# Altium PCB VNA_BASE_AF3.PcbDoc
Units mil, origin at the board's own origin, x right, y up, seen from the top; angles counter-clockwise.
Board outline 1960 x 1680.39 mil, 4 copper layers (Top Layer, Internal Plane 1, Signal Layer 1, Bottom Layer), stack 30.634 mil thick; 89 components, 116 nets, 460 pads, 227 vias.
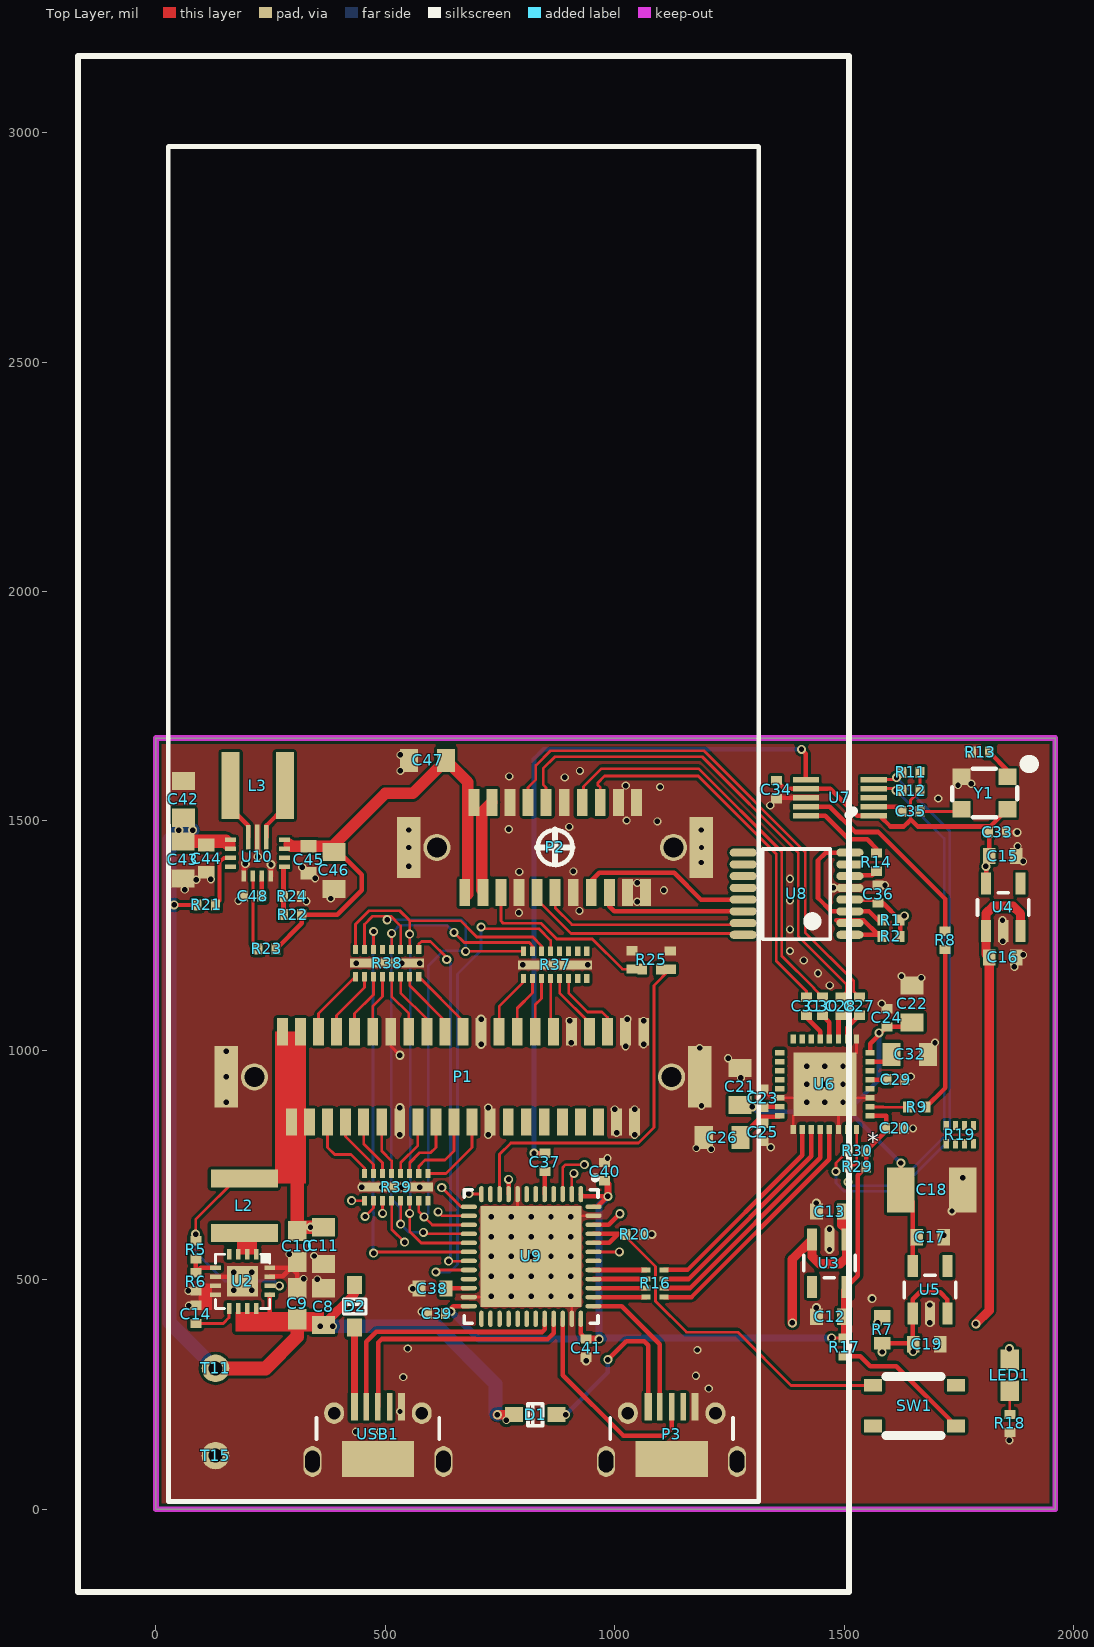
[diagram p0: Top Layer view]
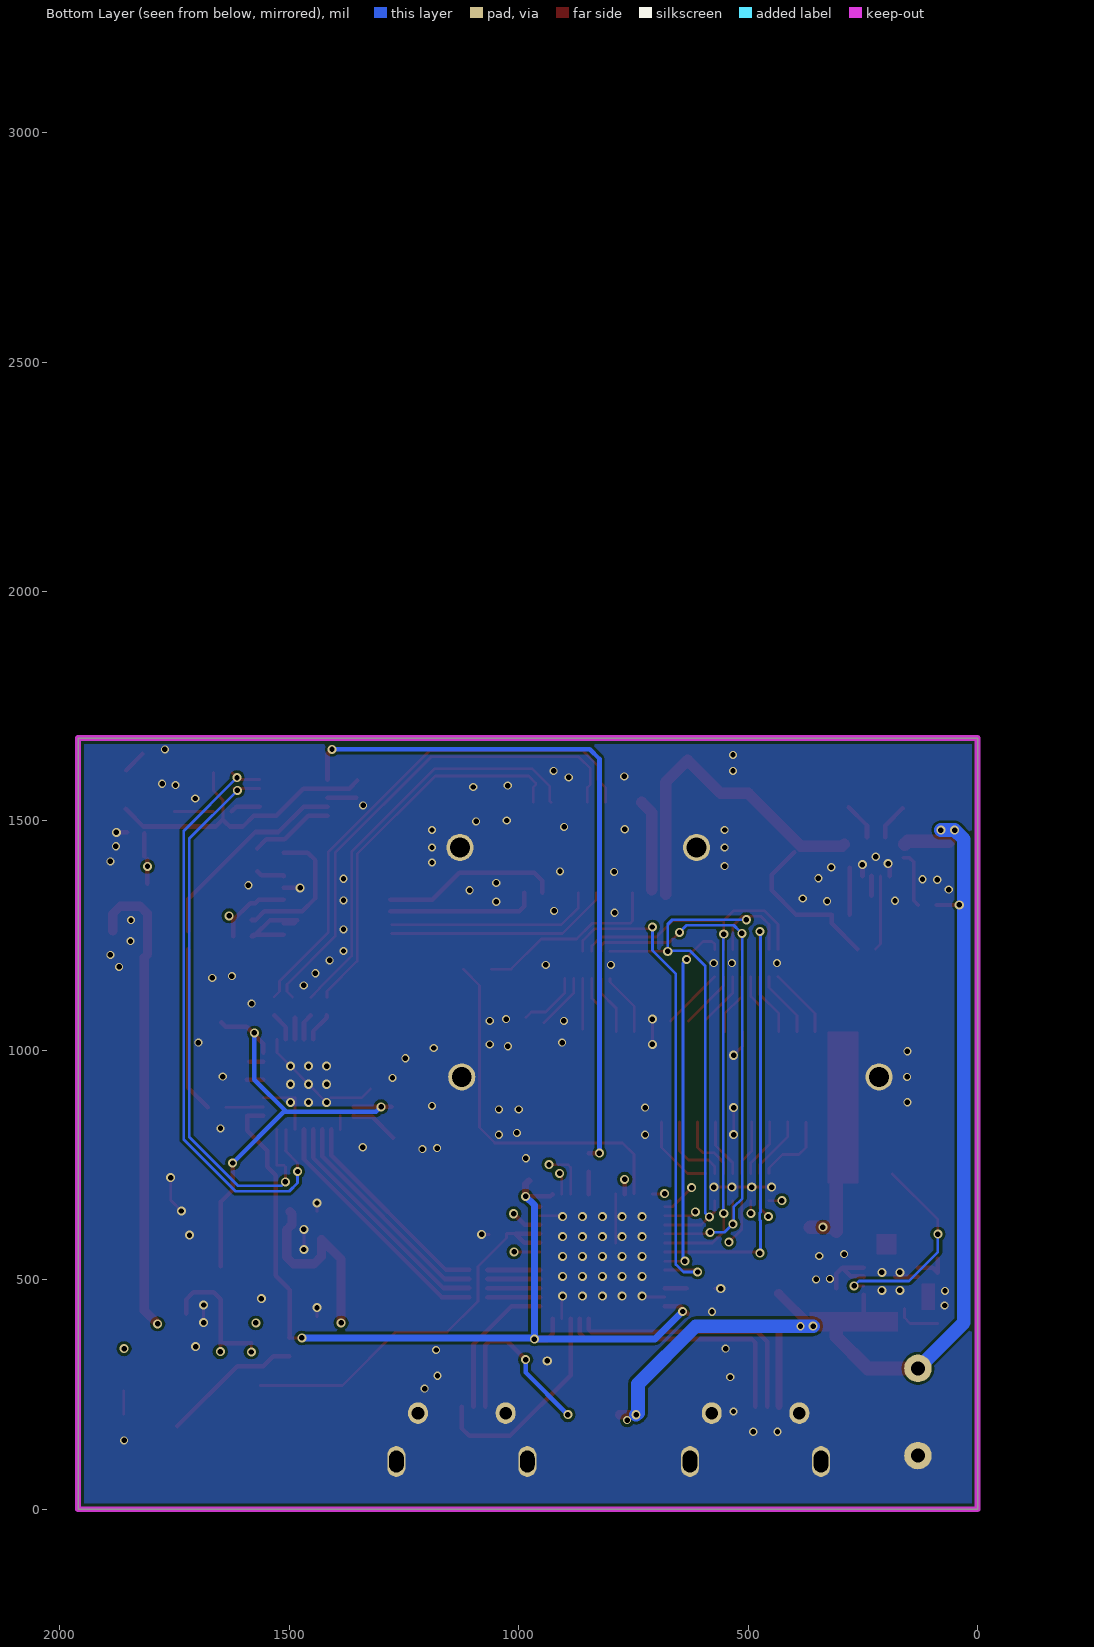
[diagram p1: Bottom Layer view, seen from below]
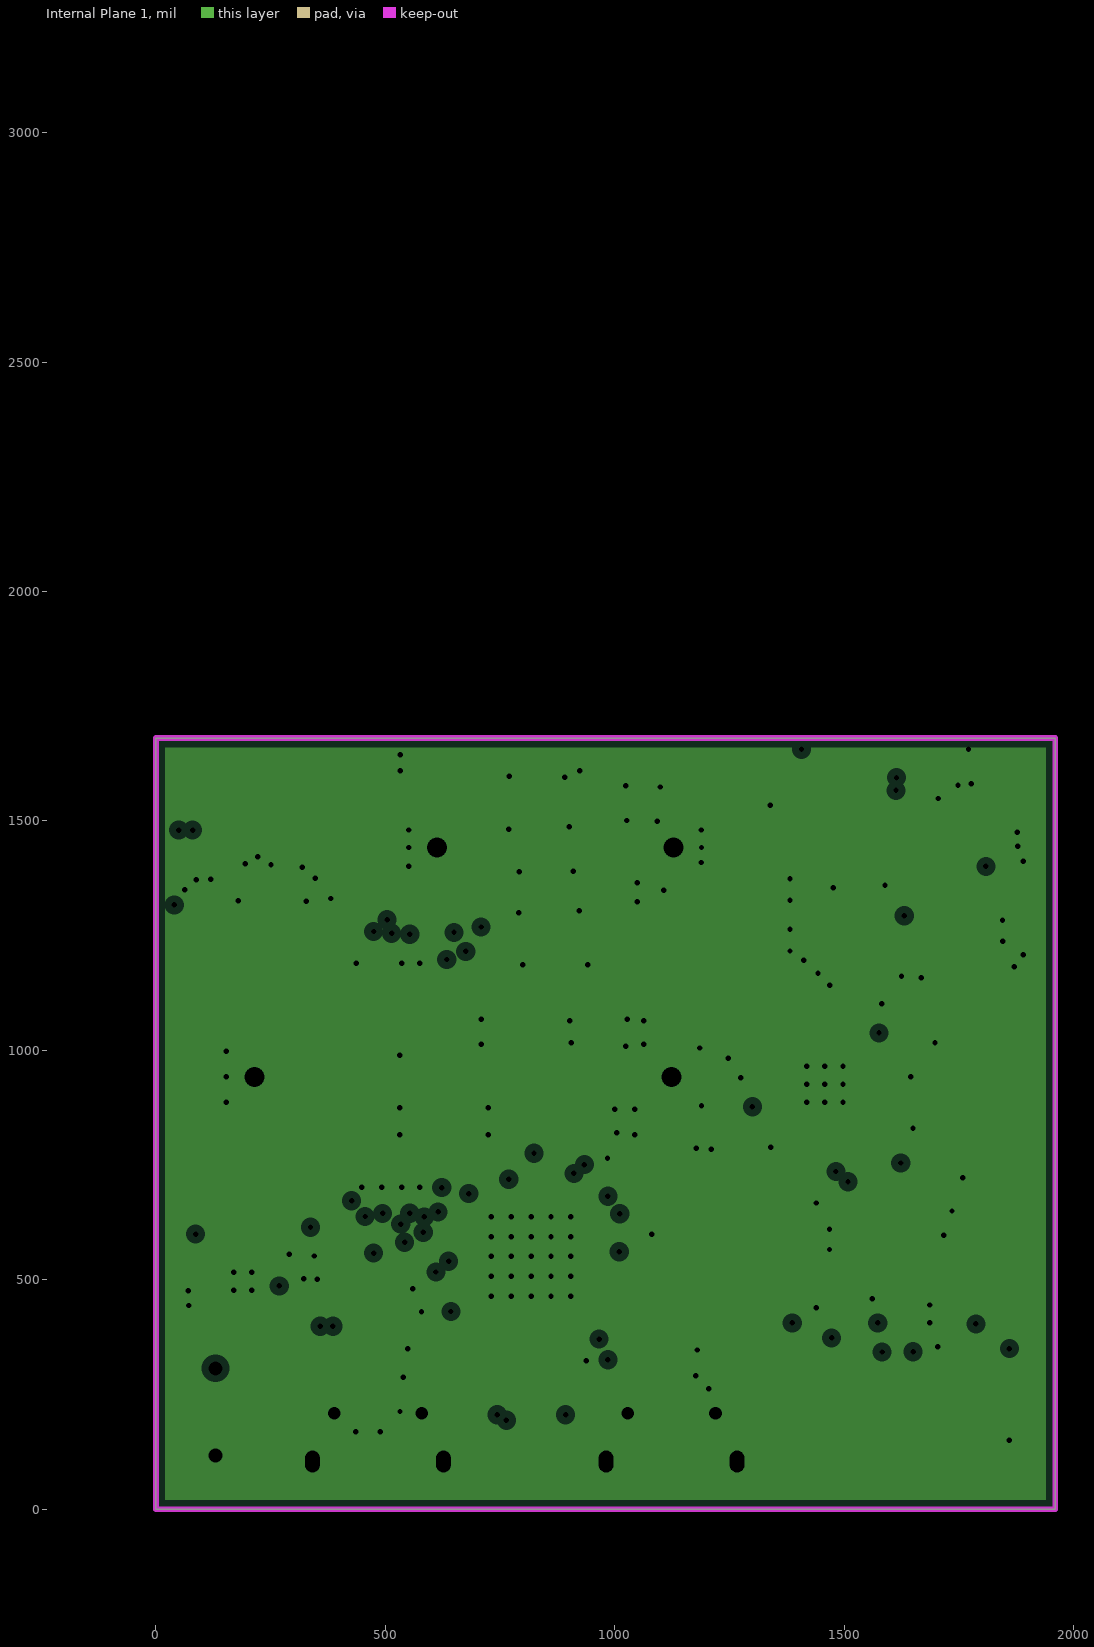
[diagram p2: Internal Plane 1, clearances drawn from the general rule]
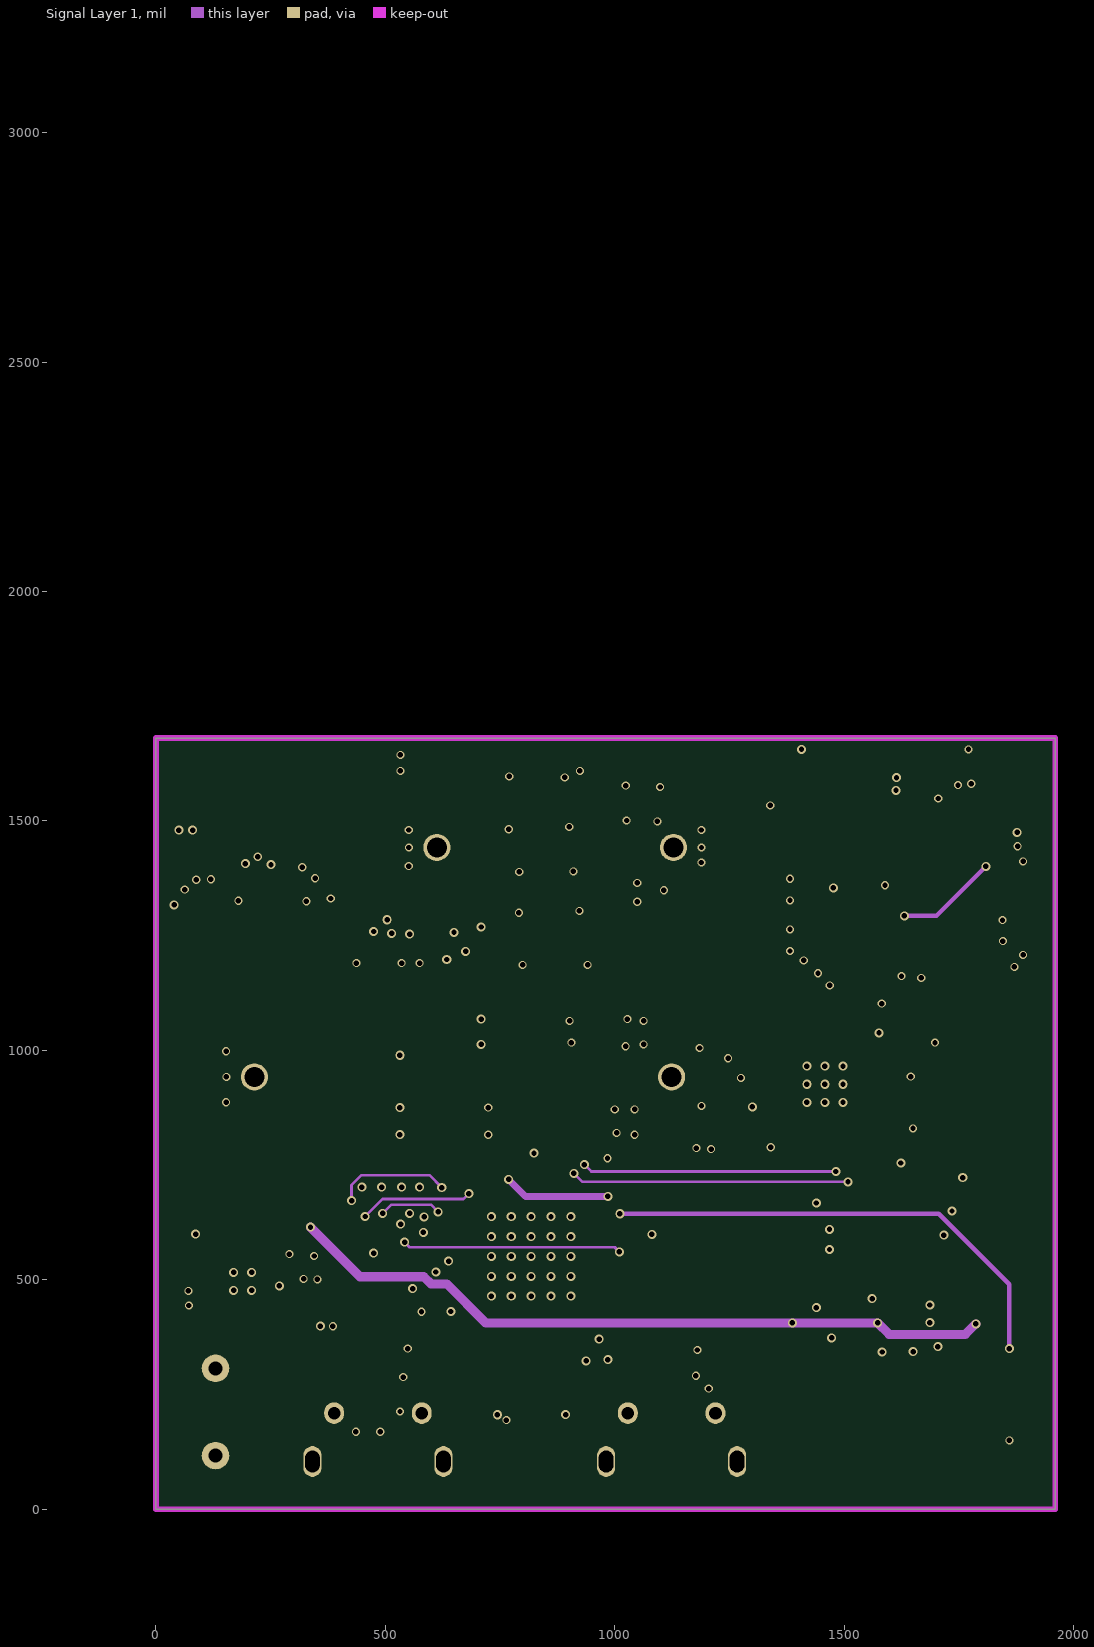
[diagram p3: Signal Layer 1]

## Layer stack, top to bottom
Top Solder: solder mask 0.4, Solder Resist, Dk 3.8
Top Layer: signal copper 1.4
Dielectric 1: core 10, Dk 4.2
Internal Plane 1: plane copper 1.417, net GND
Dielectric 3: core 10, Dk 4.2
Signal Layer 1: signal copper 1.417
Dielectric 4: prepreg 5, Dk 4.2
Bottom Layer: signal copper 1.4
Bottom Solder: solder mask 0.4, Solder Resist, Dk 3.8

## Board outline
0,0 0,1680.39 1960,1680.39 1960,0

## Design rules (kind name [scope] priority, off if disabled: settings)
Clearance 50R [InNetClass('50R') vs InPolygon] p1: gap=15 ignorepadtopadclearanceinfootprint=FALSE
Clearance [All] p2: gap=6 ignorepadtopadclearanceinfootprint=FALSE except(0: Arc-Hole Track-Hole SMDPad-Hole THPad-Hole Via-Hole Fill-Hole Poly-Hole Region-Hole Text-Hole)
DiffPairsRouting [All] p1: maxlimit=10 minlimit=6 mostfreqgap=6 toplayer_minwidth=6 toplayer_maxwidth=15 toplayer_prefwidth=15 midlayer1_minwidth=6 midlayer1_maxwidth=15 midlayer1_prefwidth=15 bottomlayer_minwidth=6 bottomlayer_maxwidth=15 bottomlayer_prefwidth=15 maxuncoupledlength=500
MinimumSolderMaskSliver [All] p1 off: minsoldermaskwidth=10
PlaneClearance [All] p1: clearance=15
PlaneConnect [All] p1: planeconnectstyle=Direct reliefexpansion=20 reliefentries=4 reliefconductorwidth=10 reliefairgap=10
PolygonConnect [All] p1: connectstyle=Direct reliefconductorwidth=10 reliefentries=4 polygonreliefangle="90 Angle" airgapwidth=10
RoomDefinition connectorA [InComponentClass('connectorA')] p1 off: confinementstyle=ConfineIn formatcopy=TRUE lockcomponents=FALSE outline 1316.04,962.09 2428.04,962.09 2428.04,1188.09 1316.04,1188.09
RoomDefinition AudioADCA [InComponentClass('AudioADCA')] p2 off: confinementstyle=ConfineIn formatcopy=TRUE lockcomponents=FALSE outline 1316.04,158.09 5214.04,158.09 5214.04,513.09 1316.04,513.09
RoomDefinition clock [InComponentClass('clock')] p3 off: confinementstyle=ConfineIn formatcopy=TRUE lockcomponents=FALSE outline 1315.04,447.09 3855.04,447.09 3855.04,796.09 1315.04,796.09
RoomDefinition MCU [InComponentClass('MCU')] p4 off: confinementstyle=ConfineIn formatcopy=TRUE lockcomponents=FALSE outline 879.04,1574.09 10029.04,1574.09 10029.04,1924.09 879.04,1924.09
RoomDefinition power [InComponentClass('power')] p5 off: confinementstyle=ConfineIn formatcopy=TRUE lockcomponents=FALSE outline 884.04,1249.09 2939.04,1249.09 2939.04,1524.09 884.04,1524.09
RoutingVias [All] p1: holewidth=12 width=20 viastyle="Through Hole" minholewidth=11.81 minwidth=19.68 maxholewidth=28 maxwidth=50
SilkToBoardRegionClearance [All] p1 off:
SilkToSilkClearance [All] p1 off: silktosilkclearance=10
SilkToSolderMaskClearance [IsPad] p1 off: minsilkscreentomaskgap=10 clearancetoexposedcopper=TRUE
SolderMaskExpansion [All] p1: expansion=4
Width [All] p1: maxlimit=60 minlimit=6 preferedwidth=6
23 further rules are at their usual default settings.

## Classes and differential pairs
component class AudioADCA: C20 C21 C22 C23 C24 C25 C26 C27 C28 C29 C30 C31 C32 R9 R29 R30 U6
component class power: C8 C9 C10 C11 C12 C13 C14 C15 C16 C17 C18 C19 C42 C43 C44 C45 C46 C47 C48 L2 L3 R5 R6 R7 R21 R22 R23 R24 T11 T15 U2 U3 U4 U5 U10
component class clock: C33 C34 C35 C36 R1 R2 R8 R11 R12 R13 R14 U7 U8 Y1
component class connectorA: P1 P2 R25 R37 R38 R39
component class MCU: C37 C38 C39 C40 C41 D1 D2 LED1 P3 R16 R17 R18 R19 R20 SW1 U9 USB1
differential pair REF1: +REF1_P -REF1_N
differential pair REFLECT1: +REFLECT1_P -REFLECT1_N

## Components (designator, comment, footprint, x,y, rotation, side; value= is the part's Value field where it differs from the comment)
C8 "Cap" 0805 364.91,441.65 r90 top value="22uF 25V"
C9 "Cap" 0603 307.91,447.65 r90 top value="4.7uF 25V"
C10 "Cap" 0603 307.91,572.65 r90 top value="4.7uF 25V"
C11 "Cap" 0805 364.91,574.65 r90 top value="22uF 25V"
C12 "4.7uF" 0603L 1469.1,419.79 r0 top
C13 "4.7uF" 0603L 1469.1,648.79 r0 top
C14 "3.3nF" 0402 87.04,424.65 r90 top
C15 "4.7uF" 0603L 1845.6,1423.51 r180 top
C16 "4.7uF" 0603L 1845.6,1202.51 r180 top
C17 "4.7uF" 0603L 1687.87,592.83 r180 top
C18 "220uF,Tan" 1210 1690.87,695.83 r180 top
C19 "4.7uF" 0603L 1679.87,359.83 r180 top
C20 "0.1uF" 0402 1610,830 r180 top
C21 "4.7uF" 0805 1273.07,921.21 r270 top
C22 "4.7uF" 0805 1648.07,1101.21 r270 top
C23 "0.1uF" 0402 1323.07,896.21 r270 top
C24 "0.1uF" 0402 1593.07,1071.21 r270 top
C25 "0.1uF" 0402 1323.07,821.21 r90 top
C26 "4.7uF" 0805 1234,810 r0 top
C27 "10uF" 0402 1533.07,1096.21 r90 top
C28 "10uF" 0402 1493.07,1096.21 r90 top
C29 "4.7uF" 0402 1613.07,936.21 r180 top
C30 "10uF" 0402 1453.07,1096.21 r270 top
C31 "10uF" 0402 1418.07,1096.21 r270 top
C32 "22uF" 0805 1643.07,991.21 r180 top
C33 "0.1uF" 0402 1834,1475 r180 top
C34 "0.1uF" 0402 1352.04,1568.52 r270 top
C35 "0.1uF" 0402 1645.46,1520.84 r180 top
C36 "0.1uF" 0402 1573.88,1340.96 r270 top
C37 "Cap" 0402 847.83,755.94 r90 top value=0.1uF
C38 "Cap" 0603L 602.83,480.94 r0 top value=4.7uF
C39 "Cap" 0402 611.54,426.49 r0 top value=0.1uF
C40 "Cap" 0402 977.83,735.94 r270 top value=0.1uF
C41 "Cap" 0402 937.83,350.94 r90 top value=0.1uF
C42 "10uF" 0805 60,1547 r270 top
C43 "10uF" 0805 59,1415 r90 top
C44 "0.1uF" 0603L 110,1418 r90 top
C45 "0.1uF" 0603L 332.87,1415.71 r90 top
C46 "10uF" 0805 387.87,1392.09 r90 top
C47 "10uF" 0805 592.09,1632.13 r0 top
C48 "0.1uF" 0402 211,1336 r180 top
D1 "" LC-SOD-323 826.85,205.98 r0 top
D2 "" LC-SOD-323 433.15,442.2 r270 top
L2 "2.2uH" L4015 192.91,602.36 r90 top
L3 "1.5uH" L4015 162.87,1577.17 r0 top
LED1 "LED0" 0603 1860.94,292.17 r270 top
P1 "DF9-41S" VNA_CHANNEL 27.64,17 r0 top
P2 "DF9-21" DF9-21P 870.16,1442.2 r180 bottom
P3 "SWD_MicroUSB" MICRO-YZX 1124,-7 r0 top
R1 "10k" 0402 1601.8,1284.07 r0 top
R2 "10k" 0402 1601.8,1248.64 r0 top
R5 "51k 1%" 0402 87.04,565.65 r270 top
R6 "10k 1%" 0402 87.04,495.65 r270 top
R7 "FB" 0603L 1582.76,391.02 r90 top value=0Ohm
R8 "22R" 0402 1720,1240 r270 top
R9 "22R" 0402 1658.07,876.21 r0 top
R11 "4.7k" 0402 1645.46,1605.84 r180 top
R12 "4.7k" 0402 1645.46,1565.84 r180 top
R13 "NC" 0402 1797,1650 r180 top
R14 "22R" 0402 1570,1410 r90 top
R16 "50R*4" 0402X4 1088,492 r180 top
R17 "1k" 0402 1499.96,353.33 r90 top value=0Ohm
R18 "10k" 0402 1860.94,187.17 r270 top value=0Ohm
R19 "50R*4" 0402X4 1752.05,816.21 r90 top
R20 "Res2" 0402 1044,599 r0 top value=10k
R21 "10k" 0402 110,1317 r180 top
R22 "17k" 0402 297.87,1295.71 r0 top
R23 "10k" 0402 242,1221 r0 top
R24 "10k" 0402 297.87,1335.71 r180 top
R25 "PiFilter" PiFIiter 1080,1177 r180 top
R29 "Res2" 0402 1528.07,746.21 r0 top value=10k
R30 "Res2" 0402 1528.07,781.21 r0 top value=10k
R37 "NUF8xxx" NUF8xxx 870.16,1186.29 r0 top
R38 "NUF8xxx" NUF8xxx 504.02,1190.23 r0 top
R39 "NUF8xxx" NUF8xxx 523.7,702.04 r0 top
SW1 "SW-PB" SW3x4 1653.62,225.66 r0 top
T11 "TestPad" TestPad 130,307 r0 top
T15 "TestPad" TestPad 130,117 r90 top
U2 "TPS62130" TPS62130 189.04,496.65 r270 top
U3 "LP5907" SOT23-5 1468.1,536.79 r180 top
U4 "LP5907" SOT23-5 1846.6,1311.51 r0 top
U5 "LP5907" SOT23-5 1686.87,477.83 r0 top
U6 "ADAU1761" ADAU1761 1458.07,926.21 r180 top
U7 "SI5351" si5351 1490.46,1550.84 r180 top
U8 "SN65LVDS105" "TSSOP16_44MM_065P - duplicate" 1396.25,1341.46 r180 top
U9 "STM32F401CCU6" STM-UFQFPN48_N 817.83,550.94 r270 top
U10 "tps63070" TPS63070 221.36,1429.34 r90 top
USB1 "USB Micro Type B" MICRO-YZX 484,-7 r0 top
Y1 "OSC_40M" TXC_7Q 1805.46,1560.84 r180 top

## Footprints (in the part's own frame and the unit in brackets; to place one, negate y for a bottom-side part, rotate by r counter-clockwise, add the part's x,y. Pads: shape width x height; smd on the part's side, far side on the other; paste and mask are expansions set on the pad)
0402 [mil] "0402-RES"
  rect 20x24 smd: 1(-19.68,0) 2(20,0)
0402X4 [mm]
  rect 0.5x0.28 smd: 1(-0.5,0.75) 2(-0.5,0.25) 3(-0.5,-0.25) 4(-0.5,-0.75) 5(0.5,-0.75) 6(0.5,-0.25) 7(0.5,0.25) 8(0.5,0.75)
0603 [mil] "0603-RES"
  rect 44x40 smd: 1(-33.46,0) 2(34,0)
  body extent -31,-16 31,16, height 31
0603L [mm]
  rect 0.7x0.9 smd: 1(-0.75,0) 2(0.75,0)
  body extent -0.8,-0.4 0.8,0.4, height 0.8
0805 [mil]
  rect 39.37x50 smd: 1(-40,0) 2(40,0)
  body extent -50,-30 50,30, height 31
1210 [mm]
  rect 1.52x2.5 smd: 1(-1.715,0) 2(1.715,0)
ADAU1761 [mm]
  rect 3.5x3.5 smd: 0(0,0)
  rect 0.5x0.3 smd: 1(-2.5,1.75) 2(-2.5,1.25) 3(-2.5,0.75) 4(-2.5,0.25) 5(-2.5,-0.25) 6(-2.5,-0.75) 7(-2.5,-1.25) 8(-2.5,-1.75) 17(2.5,-1.75) 18(2.5,-1.25) 19(2.5,-0.75) 20(2.5,-0.25) 21(2.5,0.25) 22(2.5,0.75) 23(2.5,1.25) 24(2.5,1.75)
  rect 0.3x0.5 smd: 9(-1.75,-2.5) 10(-1.25,-2.5) 11(-0.75,-2.5) 12(-0.25,-2.5) 13(0.25,-2.5) 14(0.75,-2.5) 15(1.25,-2.5) 16(1.75,-2.5) 25(1.75,2.5) 26(1.25,2.5) 27(0.75,2.5) 28(0.25,2.5) 29(-0.25,2.5) 30(-0.75,2.5) 31(-1.25,2.5) 32(-1.75,2.5)
  body extent -2.5,-2.5 2.5,2.5, height 0.8
DF9-21P [mm]
  rect 1.3x3.4 smd far side: 0(-8.1,0) 0(8.1,0)
  round 1.5 hole 1.1: 0(-6.55,0) 0(6.55,0)
  rect 0.6x1.5 smd far side: 1(-5,-2.5) 2(-4,-2.5) 3(-3,-2.5) 4(-2,-2.5) 5(-1,-2.5) 6(0,-2.5) 7(1,-2.5) 8(2,-2.5) 9(3,-2.5) 10(4,-2.5) 11(5,-2.5) 12(4.5,2.5) 13(3.5,2.5) 14(2.5,2.5) 15(1.5,2.5) 16(0.5,2.5) 17(-0.5,2.5) 18(-1.5,2.5) 19(-2.5,2.5) 20(-3.5,2.5) 21(-4.5,2.5)
  body extent -8.08,-2.83 8.02,2.77, height 0.2
L4015 [mm]
  rect 1x3.7 smd: 1(0,0) 2(3,0)
LC-SOD-323 [mm]
  rect 1x0.83 smd: 1(1.18,0) 2(-1.18,0)
  silkscreen extent -0.4,-0.6 0.4,0.6, body extent -1.35,-0.62 1.35,0.63, height 1.1
MICRO-YZX [mm]
  rect 0.4x1.5 smd: 1(-1.3,5.85) 5(1.3,5.85)
  rect 0.3x1.5 smd: 2(-0.65,5.85) 3(0,5.85) 4(0.65,5.85)
  oval 1x1.7 hole 0.8 slot 1.2 at 90 deg: 5(-3.625,2.82) 5(3.625,2.82)
  oval 1.1x1.2 hole 0.7: 5(-2.425,5.5) 5(2.425,5.5)
  rect 4x2 smd: 5(0,2.95)
  silkscreen extent -3.4,4.05 3.4,5.25, body extent -4.02,0.33 3.98,5.93, height 2.6
NUF8xxx [mm]
  rect 4.1x0.5 smd: 0(0,0)
  rect 0.28x0.51 smd: 1(-1.75,-0.75) 2(-1.25,-0.75) 3(-0.75,-0.75) 4(-0.25,-0.75) 5(0.25,-0.75) 6(0.75,-0.75) 7(1.25,-0.75) 8(1.75,-0.75) 9(1.75,0.75) 10(1.25,0.75) 11(0.75,0.75) 12(0.25,0.75) 13(-0.25,0.75) 14(-0.75,0.75) 15(-1.25,0.75) 16(-1.75,0.75)
  body extent -2,-0.8 2,0.8, height 0.9
PiFIiter [mil]
  rect 24x20 smd: 1(-41,0) 2(42,-0.31) 3(-41,-39.68) 3(42,-40)
  rect 20x24 smd: 1(-19.69,0) 2(20,0)
si5351 [mm]
  rect 1.45x0.3 smd: 1(-1.875,1) 2(-1.875,0.5) 3(-1.875,0) 4(-1.875,-0.5) 5(-1.875,-1) 6(1.875,-1) 7(1.875,-0.5) 8(1.875,0) 9(1.875,0.5) 10(1.875,1)
  silkscreen extent -0.75,0.75 -0.5,0.95
SOT23-5 [mil] "SOT23-5"
  rect 22x48 smd: 1(-37.4,-51.19) 2(0,-51.19) 3(38,-51.19) 4(38,52) 5(-37.4,52)
  silkscreen extent -56,-17 56,32, body extent -57,-55 57,55, height 47
STM-UFQFPN48_N [mm] "QFN, 48-Leads, Body 7.1x7.1mm, Pitch 0.5mm, Thermal Pad 5.6x5.6mm, IPC Medium Density"
  oval 0.9x0.25 smd: 1(-3.45,2.75) 2(-3.45,2.25) 3(-3.45,1.75) 4(-3.45,1.25) 5(-3.45,0.75) 6(-3.45,0.25) 7(-3.45,-0.25) 8(-3.45,-0.75) 9(-3.45,-1.25) 10(-3.45,-1.75) 11(-3.45,-2.25) 12(-3.45,-2.75) 25(3.45,-2.75) 26(3.45,-2.25) 27(3.45,-1.75) 28(3.45,-1.25) 29(3.45,-0.75) 30(3.45,-0.25) 31(3.45,0.25) 32(3.45,0.75) 33(3.45,1.25) 34(3.45,1.75) 35(3.45,2.25) 36(3.45,2.75)
  oval 0.25x0.9 smd: 13(-2.75,-3.45) 14(-2.25,-3.45) 15(-1.75,-3.45) 16(-1.25,-3.45) 17(-0.75,-3.45) 18(-0.25,-3.45) 19(0.25,-3.45) 20(0.75,-3.45) 21(1.25,-3.45) 22(1.75,-3.45) 23(2.25,-3.45) 24(2.75,-3.45) 37(2.75,3.45) 38(2.25,3.45) 39(1.75,3.45) 40(1.25,3.45) 41(0.75,3.45) 42(0.25,3.45) 43(-0.25,3.45) 44(-0.75,3.45) 45(-1.25,3.45) 46(-1.75,3.45) 47(-2.25,3.45) 48(-2.75,3.45)
  rect 5.6x5.6 smd: 49(0,0)
  silkscreen extent -4.47,-3.7 3.7,3.7, body extent -3.55,-3.55 3.55,3.55, height 0.6
SW3x4 [mm]
  rect 1x0.7 smd: 1(-2.3,1.125) 2(2.3,-1.125) 3(2.3,1.125) 4(-2.3,-1.125)
  silkscreen extent -1.58,-1.65 1.45,1.63, body extent -2,-1.5 2,1.5, height 2.6
TestPad [mil]
  round 60 hole 30: 1(0,0)
TPS62130 [mm]
  rect 1.7x1.7 smd: 0(0,0)
  rect 0.6x0.25 smd: 1(-1.5,0.75) 2(-1.5,0.25) 3(-1.5,-0.25) 4(-1.5,-0.75) 9(1.5,-0.75) 10(1.5,-0.25) 11(1.5,0.25) 12(1.5,0.75)
  rect 0.25x0.6 smd: 5(-0.75,-1.5) 6(-0.25,-1.5) 7(0.25,-1.5) 8(0.75,-1.5) 13(0.75,1.5) 14(0.25,1.5) 15(-0.25,1.5) 16(-0.75,1.5)
  silkscreen extent -1.5,-1.5 1.5,1.5, body extent -1.5,-1.5 1.5,1.5, height 0.6
TPS63070 [mm]
  rect 0.6x0.25 smd: 1(-1.25,0.75) 2(-1.25,0.25) 3(-1.25,-0.25) 4(-1.25,-0.75)
  rect 0.25x0.6 smd: 5(-0.75,-1.5) 6(-0.25,-1.5) 7(0.25,-1.5) 8(0.75,-1.5) 12(0.75,1.5) 13(0.25,1.5) 14(-0.25,1.5) 15(-0.75,1.5)
  rect 1.35x0.25 smd: 9(0.9,-0.5) 11(0.9,0.5)
  rect 1.7x0.25 smd: 10(0.75,0)
  body extent -1.25,-1.5 1.25,1.5, height 1
"TSSOP16_44MM_065P - duplicate" [mm]
  oval 1.5x0.45 smd: 1(-2.95,2.275) 2(-2.95,1.625) 3(-2.95,0.975) 4(-2.95,0.325) 5(-2.95,-0.325) 6(-2.95,-0.975) 7(-2.95,-1.625) 8(-2.95,-2.275) 9(2.95,-2.275) 10(2.95,-1.625) 11(2.95,-0.975) 12(2.95,-0.325) 13(2.95,0.325) 14(2.95,0.975) 15(2.95,1.625) 16(2.95,2.275)
  silkscreen extent -1.88,-2.47 1.88,2.53
TXC_7Q [mm]
  rect 1x0.9 smd: 1(-1.275,-0.9) 2(1.275,-0.9) 3(1.275,0.9) 4(-1.275,0.9)
  silkscreen extent -2.52,-1.6 1.78,1.35
VNA_CHANNEL [mm]
  rect 1.3x3.4 smd: 0(3.2,23.5) 0(29.4,23.5)
  round 1.5 hole 1.1: 0(4.75,23.5) 0(27.85,23.5)
  rect 0.6x1.5 smd: 1(6.3,26) 2(7.3,26) 3(8.3,26) 4(9.3,26) 5(10.3,26) 6(11.3,26) 7(12.3,26) 8(13.3,26) 9(14.3,26) 10(15.3,26) 11(16.3,26) 12(17.3,26) 13(18.3,26) 14(19.3,26) 15(20.3,26) 16(21.3,26) 17(22.3,26) 18(23.3,26) 19(24.3,26) 20(25.3,26) 21(26.3,26) 22(25.8,21) 23(24.8,21) 24(23.8,21) 25(22.8,21) 26(21.8,21) 27(20.8,21) 28(19.8,21) 29(18.8,21) 30(17.8,21) 31(16.8,21) 32(15.8,21) 33(14.8,21) 34(13.8,21) 35(12.8,21) 36(11.8,21) 37(10.8,21) 38(9.8,21) 39(8.8,21) 40(7.8,21) 41(6.8,21)
  silkscreen extent -5,-5 37.66,80, body extent 3.28,20.7 29.38,26.3, height 0.4

## Part data
C8 C9 C10 C11 C37 C38 C39 C40 C41: "Capacitor", LatestRevisionDate=17-Jul-2002, LatestRevisionNote="Re-released for DXP Platform.", PackageDescription="Radial Cap, Thru-Hole; 2 Leads; 0.3 in Pin Spacing", PackageReference=RAD-0.3, Published=8-Jun-2000, Publisher="Altium Limited"
C12 C13 C14 C15 C16 C17 C18 C19 C20 C21 C22 C23 C24 C25 C26 C27 C28 C29 C30 C31 C32 C42 C43 C44 C45 C46 C47 C48: library part Cap, "Capacitor", LatestRevisionDate=17-Jul-2002, LatestRevisionNote="Re-released for DXP Platform.", PackageDescription="Radial Cap, Thru-Hole; 2 Leads; 0.3 in Pin Spacing", PackageReference=RAD-0.3, Published=8-Jun-2000, Publisher="Altium Limited"
C33 C34 C35 C36: library part CAP0402-CAP, "<b>Capacitor</b> / Standard 0603 ceramic capacitor, and 0.1\" leaded capacitor.", PARTNO=CC0402ZRY5V7BB104
D1 D2: library part "Diode 1N4148", "High Conductance Fast Diode", Code_JEDEC=DO-204-AH, ComponentLink1Description="Manufacturer Link", ComponentLink1URL=http://www.fairchildsemi.com/, ComponentLink2Description=Datasheet, ComponentLink2URL=http://www.fairchildsemi.com/ds/1N%2F1N4148.pdf, DatasheetVersion=1997, LatestRevisionDate=17-Jul-2002, LatestRevisionNote="Re-released for DXP Platform.", PackageDescription="Diode, Axial; Body 3.8 x 1.9 mm (LxDia. max), Lead Dia. 0.53 mm (max)", PackageReference=DO-35, Published=8-Jun-2000, Publisher="Altium Limited"
L2: library part Inductor, "Inductor", Code_IEC=1005, Code_JEITA=0402, LatestRevisionDate=29-May-2009, LatestRevisionNote="IPC-7351 Footprint Added.", PackageDescription="Chip Inductor", PackageReference=0402-A, Published=8-Jun-2000, Publisher="Altium Limited"
L3: library part "Inductor Iron Dot", "Magnetic-Core Inductor with Winding Polarity Marking", LatestRevisionDate=17-Jul-2002, LatestRevisionNote="Re-released for DXP Platform.", PackageDescription="Diode; 2 Leads", PackageReference=DIODE_SMC, Published=24-Mar-1999, Publisher="Altium Limited"
LED1: "Typical INFRARED GaAs LED", LatestRevisionDate=08-Jul-2005, LatestRevisionNote="Mech Layer 1 removed.", PackageDescription="LED; 2 Leads", PackageReference=LED-0, Published=8-Jun-2000, Publisher="Altium Limited"
P3: "Connector SMD USB Micro Type B middle mount", Manufacturer 1="Molex Inc", Package / Case=SMD, Supplier Part Number 1=WM17142CT-ND, SCDType=undef, Supplier 1=Digi-Key
R1 R2 R5 R6 R7 R8 R9 R11 R12 R13 R14 R17 R18 R21 R22 R23 R24: library part Res2, "Resistor", LatestRevisionDate=17-Jul-2002, LatestRevisionNote="Re-released for DXP Platform.", PackageDescription="Axial Device, Thru-Hole; 2 Leads; 0.4 in Pin Spacing", PackageReference=AXIAL-0.4, Published=8-Jun-2000, Publisher="Altium Limited"
R16 R19: library part Res*4, "Resistor", LatestRevisionDate=17-Jul-2002, LatestRevisionNote="Re-released for DXP Platform.", PackageDescription="Axial Device, Thru-Hole; 2 Leads; 0.4 in Pin Spacing", PackageReference=AXIAL-0.4, Published=8-Jun-2000, Publisher="Altium Limited"
R20 R29 R30: "Resistor", LatestRevisionDate=17-Jul-2002, LatestRevisionNote="Re-released for DXP Platform.", PackageDescription="Axial Device, Thru-Hole; 2 Leads; 0.4 in Pin Spacing", PackageReference=AXIAL-0.4, Published=8-Jun-2000, Publisher="Altium Limited"
SW1: "Switch", LatestRevisionDate=17-Jul-2002, LatestRevisionNote="Re-released for DXP Platform.", PackageDescription="Switch; 2 Leads", PackageReference=SPST-2, Published=24-Mar-1999, Publisher="Altium Limited"
U9: "ARM Cortex-M4 32-bit MCU+FPU, 105 DMIPS, 256 kB Flash, 64 kB Internal RAM, 36 I/Os, 48-pin UFQFPN, -40 to 85 degC, Tray", I/Os (High Current)=36, Manufacturer=STMicroelectronics, Operating Frequency(F) (Processor speed) (MHz)=84, Supplier Part Number 1=19X6217, Supply Voltage(Vcc) max (V)=3.6, Supply Voltage(Vcc) min (V)=1.8, ComponentLink1Description="Manufacturer URL", ComponentLink1URL=http://www.st.com/web/en/home.html, ComponentLink2Description=Datasheet, ComponentLink2URL=http://www.st.com/st-web-ui/static/active/en/resource/technical/document/data_brief/DM00071938.pdf, ComponentLink3Description="Package Specification", ComponentLink3URL=http://www.st.com/st-web-ui/static/active/en/resource/technical/document/data_brief/DM00071938.pdf, Core="ARM Cortex-M4", DatasheetVersion="Rev. 1", FLASH Size (Prog) (kB)=256, Internal RAM Size (kB)=64, Mounting Technology="Surface Mount", PackageDescription="48-Pin Ultra Thin Fine Pitch Quad Flat No-Lead, 7 x 7 x 0.6 mm Body, 0.5 mm Pitch, Exposed Pad", PackageReference=UFQFPN48, PackageVersion="Rev. 1, 04/2013", Packing=Tray, PartNumber=STM32F401CCU6, Supplier 1=Newark, Supplier 2=Mouser, Supplier Part Number 2=511-STM32F401CCU6
USB1: library part USB_Micro_TypeB, "Connector SMD USB Micro Type B middle mount", Manufacturer 1="Molex Inc", Manufacturer Part Number 1=47491-0001, Package / Case=SMD, Supplier Part Number 1=WM17142CT-ND, SCDType=undef, Supplier 1=Digi-Key

## Via types
v1: diameter 19.68, hole 11.81, Top Layer to Bottom Layer, 123 vias
v2: diameter 17.72, hole 11.81, Top Layer to Bottom Layer, 104 vias

## Nets (pads, with @x,y where several pads share a name; then routed paths per layer and width w, separated by ;. In a path a pad name is that pad's centre, name@x,y a point inside that pad or via, vN(x,y) a via of type N, cw(c..) or ccw(c..) an arc to the next point about the centre after c; other vN are vias at no path point)
3.3A: C17.2 C18.2 C21.2 C22.2 C23.2 C24.2 U5.5 U6.8 U6.23 | length 1023.4
  Top Layer w10: C21.2@1277.28,877 v1(1300,877) U6.23 ; U6.8 1556.5,1014.64 C24.2 1638.07,1051.21 C22.2 ; v1(1623.35,754.65) C18.2 1649.47,669.71 U5.5
  Bottom Layer w10: v1(1300,877) 1311,866 1506.07,866 ; v1(1576,1038) 1576,935.93 1506.07,866 ; v1(1623.35,754.65) 1512,866 1506.07,866
3.3Clock: C15.2 C33.2 C34.1 C36.2 R1.2 R2.2 R11.1 R12.1 U4.5 U7.1 U7.7 U8.4 Y1.4 | length 1185.7
  Top Layer w6: 1639.19,1499.84 1644.46,1505.11 1644.46,1545.16 R12.1 R11.1
  Top Layer w10: C34.1 1369.72,1570.53 U7.7 1469.47,1570.53 1528.53,1511.47 U7.1 1577.53,1511.47 1601,1488 1630.18,1488 1640.61,1498.43 ; U8.4 1566.18,1328.66 C36.2 1584.91,1320.96 R1.2 ; R2.2 R1.2 ; v1(1631,1293.28) R1.2 ; 1645.31,1503.13 1660.44,1488 1818.25,1488 Y1.4 Y1.4@1856.32,1526.07 ; U4.5 C15.2@1809.2,1416.64 ; C15.2 C33.2@1816.07,1472.93
  Signal Layer 1 w10: v1(1631,1293.28) 1701.28,1293.28 v1(1809,1401)
3.3D: C12.2 C20.2 C39.2 C40.2 C41.2 R17.2 R29.2 R30.2 U3.5 U6.1 U9.1 U9.9 U9.24 U9.36 U9.48 | length 2296.5
  Top Layer w6: v1(1472.67,373.33) R17.2
  Top Layer w10: C39.2 647.72,442.67 U9.24 ; U9.9 v1@768.62,718.62 ; U9.36 926.1,382.67 C41.2 ; U9.1 930.87,682 v1(985,682) 962.2,659.2 U9.48 ; R17.2 1498.63,374.66 C12.2 1498.63,477.91 U3.5 1529.94,509.22 1529.94,728.08 R29.2 R30.2 1591.97,825.11 1591.97,857.32 U6.1
  Top Layer w15: C41.2 v1(965.94,370.94) ; C40.2 985,708.77 v1(985,682)
  Signal Layer 1 w15: v1(769,719) 806,682 v1(985,682)
  Bottom Layer w15: v1(643,431) 703.06,370.94 v1(965.94,370.94) ; v1(985,682) 965.94,662.94 v1(965.94,370.94) ; v1(1472.67,373.33) 968.33,373.33 v1(965.94,370.94)
3.6V: C10.2 C11.2 C13.2 C16.2 L2.2 P1.1 P1.2 P1.40 P1.41 R5.1 R7.2 U2.14 U3.1 U3.3 U4.1 U4.3 | length 3631.9
  Top Layer w6: v1(86.69,599.68) 86.69,631.41 L2.2@186.04,730.76 ; U2.14 v1(269.09,486.8)
  Top Layer w20: v1(1387,406) 1387,544.87 U3.3 1430.1,550.9 1446,535 1491,535 1505.5,549.5 U3.1 1505.5,609.3 1495.1,619.7 1494,619.7 1494,644.16 C13.2 ; v1(1787,404) 1816.07,433.07 C16.2 ; C16.2@1809.2,1209.39 U4.1 1809.2,1298.2 1825,1314 1868,1314 1884.6,1297.4 U4.3
  Top Layer w30: C10.2 307.91,731.09 ; C10.2@315.91,614.65 v1(337,614.65) C11.2
  Signal Layer 1 w20: v1(337,614.65) 444.87,506.78 583.99,506.78 599.61,491.16 633.84,491.16 719,406 v1(1387,406) v1(1573,406) 1597.97,381.03 1764.03,381.03 v1(1787,404)
  Bottom Layer w6: v1(86.69,599.68) 86.69,560.31 149.68,497.32 258.58,497.32 v1(269.09,486.8)
5.5V-A: C45.2 C46.2 C47.2 P2.10 P2.11 P2.12 P2.13 R22.2 R23.2 U10.7 U10.8 | length 1286.5
  Top Layer w10: R23.2 317.87,1276.87 R22.2 395.71,1295.71 449,1349 449,1382.76 C46.2@399.68,1432.09
  Top Layer w25: 291,1449 294.76,1445.24 C45.2 385.24,1445.24 500,1560 559.95,1560 C47.2 680,1584.22 P2.11@680,1340 ; P2.10@710,1350 710,1518.26 P2.13
GND: C8.2 C9.2 C10.1 C11.1 C12.1 C13.1 C14.2 C15.1 C16.1 C17.1 C18.1 C19.1 C20.1 C21.1 C22.1 C23.1 C24.1 C25.1 C26.1 C29.1 C32.1 C33.1 C34.2 C36.1 C38.1 C39.1 C40.1 C41.1 C42.1 C43.1 C44.1 C45.1 C46.1 C47.1 C48.2 P1.0 P1.7 P1.12 P1.17 P1.20 P1.21 P1.22 P1.23 P1.30 P1.35 P2.0 P2.1 P2.2 P2.5 P2.8 P2.14 P2.17 P2.20 P2.21 P3.5 R6.2 R13.2 R18.2 R20.2 R24.1 R25.3 R37.0 R38.0 R39.0 T15.1 U2.0 U2.6 U2.7 U2.8 U2.15 U2.16 U3.2 U4.2 U5.2 U6.0 U6.3 U6.9 U6.22 U6.25 U6.30 U7.8 U8.5 U9.8 U9.23 U9.35 U9.47 U9.49 U10.1 U10.4 U10.10 USB1.5 Y1.2 | length 1633.1
  Top Layer w6: v1(448.9,702.04) v1(492.2,702.04) R39.0 v1(535.51,702.04) v1(574.88,702.04) ; P1.7 511.89,1009.13 v1(531.57,989.44) ; v1(531.57,816.21) P1.35 v1(531.57,875.27) ; v1(559.76,480.94) C38.1 ; U9.23 U9.49@729.25,462.35 ; v1(708.74,1013.06) P1.12 v1(708.74,1068.18) ; U9.49@788.31,580.46 U9.8 ; U9.35 U9.49@906.42,462.35 ; U9.49@906.42,639.52 U9.47 ; v1(937.83,323.34) C41.1 ; R20.2 v1(1081,599) ; C23.1 1342.28,896.68 U6.22 U6.0@1408.86,896.68 ; U6.25 U6.0@1389.17,857.32 ; v1(1418.7,886.84) v1(1458.07,926.21) ; C12.1 v1(1439.57,439.57) ; C13.1 v1(1439.57,667.43) ; U6.0@1458.07,923.07 v1(1458.07,926.21) ; v1(1468.1,566.1) U3.2 v1(1468.1,609.9) ; U6.30 1487.6,896.68 U6.3 ; U6.9 1526.97,995.11 v1(1497.44,965.58) v1(1458.07,926.21) ; v1(1560.94,458.94) v1@1560.94,467.17 ; v1(1686.87,406.87) U5.2 v1(1686.87,445.13) ; v1(1704,354.43) C19.1 ; C17.1 v1(1717.4,597.4) ; v1(1735,650) 1758.39,673.39 C18.1 v1(1758.39,722.61)
  Top Layer w10: U2.6 U2.0@179.2,506.49 ; U10.1 191.83,1404.83 194,1407 v1(195,1407) ; U2.15 248.09,507.65 276.38,507.65 C10.1@294.91,526.17 ; U2.16 C10.1@294.91,526.17 ; U10.4 250.89,1404.89 v1(251,1405) ; C9.2 307.91,513.16 C10.1@294.91,526.17 ; C34.2@1354.36,1550.84 U7.8 ; v1(1476.25,1354.25) U8.5 ; C33.1 v1(1877,1475)
  other v1: 731.22,464.32 774.53,464.32 817.83,464.32 861.14,464.32 904.45,464.32 169.35,476.96 208.72,476.96 731.22,507.63 774.53,507.63 817.83,507.63 861.14,507.63 904.45,507.63 169.35,516.33 208.72,516.33 731.22,550.94 774.53,550.94 817.83,550.94 861.14,550.94 904.45,550.94 731.22,594.24 774.53,594.24 817.83,594.24 861.14,594.24 904.45,594.24 731.22,637.55 774.53,637.55 817.83,637.55 861.14,637.55 904.45,637.55 1458.07,886.84 1497.44,886.84 1418.7,926.21 1497.44,926.21 1418.7,965.58 1458.07,965.58
  other v2: 1860,150 436,169 489,169 532,213 1205,263 539,288 1177,291 1180,347 549,350 578.82,430.39 72,444 71,476 352,501 322,502 345,552 291,556 984.33,765.03 1210,785 1178,787 1340,789 724.49,816.21 1043.39,816.21 1004.02,820.15 1650,830 1000.08,871.33 1043.39,871.33 724.49,875.27 1189.06,879.2 153,887 1275,940 153.62,942.2 1645,943 1247,983 153,998 1185.12,1005.19 1023.7,1009.13 1063.07,1013.06 905.59,1017 1698,1017 901.65,1064.24 1063.07,1064.24 1027.64,1068.18 1582,1102 1468.5,1141.73 1668,1158 1625,1162 1443,1168 1871,1182 799.29,1186.29 941.02,1186.29 437.09,1190.23 535.51,1190.23 574.88,1190.23 1412,1196 1890,1208 1381.89,1216.54 1846,1238 1381.89,1263.78 1845,1284 791,1300 923,1304 1049,1324 328,1325 180,1326 1381.89,1326.77 381,1331 1107,1349 62.99,1350.39 1589,1360 1049,1365 88,1372 120,1373 1381.89,1374.02 347,1375 792,1389 910,1390 319,1399 551.18,1401.57 1188.98,1409.45 1890,1412 222,1422 551.26,1442.2 1189.05,1442.2 1878,1445 551.18,1480.31 1188.98,1480.31 769,1482 901,1487 1093,1499 1026,1501 1339,1534 1705,1549 1099,1574 1024,1577 1748,1578 1777,1581 891,1595 770,1597 533,1609 924,1609 533,1644 1771,1656
KEY: R20.1 SW1.1 U9.44 U9.45 | length 857.8
  Top Layer w6: 1008.15,600.94 1026.83,600.94 1026.83,591.09 1088.84,529.08 1088.84,453.23 1156.08,386 1268,386 1384.05,269.95 SW1.1
  Top Layer w10: U9.44 987.68,580.46 1007.36,600.15 U9.45
NetC14_1: C14.1 U2.9 | length 97.7
  Top Layer w6: C14.1 146.96,404.96 159.51,417.51 U2.9
NetC19_2: C19.2 R7.1 U5.1 U5.3 | length 319.2
  Top Layer w6: v1(1582.76,342.76) R7.1 ; v1(1650.35,343.35) C19.2
  Top Layer w10: R7.1 1648.68,361.49 C19.2@1649.47,360.7 ; C19.2 C19.2@1649.47,360.7 ; U5.3 1724.87,457.13 1709,473 1665,473 1649.47,457.47 U5.1 C19.2@1649.47,360.7
NetC25_2: C25.2 C26.2 U6.24 | length 106.5
  Top Layer w10: C26.2 1319.21,855.21 1359.65,855.21 U6.24
NetC27_1: C27.1 U6.10 | length 62.6
  Top Layer w10: U6.10 1507.28,1050.74 C27.1
NetC28_1: C28.1 U6.11 | length 46.4
  Top Layer w10: U6.11 C28.1@1487.6,1071.06
NetC29_2: C29.2 U6.5 | length 36.4
  Top Layer w10: U6.5 C29.2@1592.91,936.06
NetC30_2: C30.2 U6.12 | length 57.7
  Top Layer w10: C30.2 1467.91,1061.37 U6.12
NetC31_2: C31.2 U6.13 | length 64.1
  Top Layer w10: C31.2 1418.07,1071.45 1448.23,1041.29 U6.13
NetC32_2: C32.2 U6.7 | length 30.8
  Top Layer w10: U6.7 C32.2@1587.28,975.43
NetC35_1: C35.1 Y1.3 | length 85.6
  Top Layer w6: C35.1 Y1.3@1750.7,1520.84
NetC35_2: C35.2 U7.2 | length 65.5
  Top Layer w10: U7.2 1615.15,1531.16 C35.2
NetC37_1: C37.1 U9.5 | length 49
  Top Layer w10: U9.5 C37.1@847.36,735.78
NetC37_2: C37.2 U7.6 | length 1544.3
  Top Layer w10: v1(824.06,775.94) C37.2 ; v1(1407,1656) 1416.65,1646.35 U7.6
  Bottom Layer w10: v1(824.06,775.94) 824.06,1635.06 845,1656 v1(1407,1656)
NetC38_2: C38.2 U9.22 | length 48.5
  Top Layer w10: C38.2@633.46,482.04 U9.22
NetC48_1: C48.1 U10.3 | length 43.1
  Top Layer w10: C48.1@231.2,1337.06 U10.3
NetD1_1: D1.1 P3.1 | length 400
  Top Layer w10: v1(985,326) 1025,366 1064,366 1072.91,357.09 P3.1@1072.91,223.41
  Bottom Layer w10: v1(893,206) 985,298 v1(985,326)
NetD2_1: D2.1 USB1.1 | length 172.1
  Top Layer w15: USB1.1@433.15,223.65 D2.1
NetL2_1: L2.1 U2.1 U2.2 U2.3
NetLED1_1: LED1.1 U9.46 | length 1120.1
  Top Layer w10: U9.46 986.83,619.83 v1(1011,644)
  Signal Layer 1 w10: v1(1011,644) 1706,644 1860,490 v1(1860,350)
NetLED1_2: LED1.2 R18.1 | length 51.3
  Top Layer w6: R18.1 LED1.2
NetP1_3: P1.3 R38.1 | length 153.5
  Top Layer w6: P1.3 354.41,1079.99 R38.1
NetP1_4: P1.4 R38.2 | length 145.4
  Top Layer w6: P1.4 393.78,1076.06 454.8,1137.08 R38.2
NetP1_5: P1.5 R38.3 | length 137.2
  Top Layer w6: P1.5 433.15,1079.99 474.49,1121.33 R38.3
NetP1_6: P1.6 R38.4 | length 129
  Top Layer w6: P1.6 472.52,1095.74 494.17,1117.39 R38.4
NetP1_8: P1.8 R38.5 | length 135.6
  Top Layer w6: R38.5 513.86,1117.39 551.26,1079.99 P1.8
NetP1_9: P1.9 R38.6 | length 116.2
  Top Layer w6: R38.6 533.54,1125.27 P1.9@590.63,1068.18
NetP1_10: P1.10 R38.7 | length 128.3
  Top Layer w6: R38.7 553.23,1141.02 P1.10@630,1064.24
NetP1_11: P1.11 R38.8 | length 136.4
  Top Layer w6: R38.8 P1.11@669.37,1064.24
NetP1_13: P1.13 R37.1 | length 138.2
  Top Layer w6: P1.13 748.11,1095.74 801.26,1148.89 R37.1
NetP1_14: P1.14 R37.2 | length 130
  Top Layer w6: P1.14 787.48,1091.8 820.94,1125.27 R37.2
NetP1_15: P1.15 R37.3 | length 121.8
  Top Layer w6: P1.15 826.85,1099.68 840.63,1113.46 R37.3
NetP1_16: P1.16 R37.4 | length 110.2
  Top Layer w6: P1.16@860.32,1046.53 R37.4
NetP1_18: P1.18 R37.5 | length 123.4
  Top Layer w6: R37.5 880,1125.27 P1.18@944.96,1060.31
NetP1_19: P1.19 R37.6 | length 138.2
  Top Layer w6: R37.6 899.69,1125.27 941.02,1083.93 972.52,1083.93 984.33,1072.12
NetP1_31: P1.31 R39.9 | length 175.2
  Top Layer w6: R39.9 631.97,731.57 689.05,788.65 P1.31
NetP1_32: P1.32 R39.10 | length 169.4
  Top Layer w6: R39.10 572.91,747.32 586.69,761.09 630,761.09 649.68,780.78 P1.32
NetP1_33: P1.33 R39.11 | length 149.7
  Top Layer w6: R39.11 553.23,755.19 574.88,776.84 598.5,776.84 610.31,788.65 P1.33
NetP1_34: P1.34 R39.12 | length 127.7
  Top Layer w6: R39.12 533.54,755.19 570.94,792.59 P1.34
NetP1_36: P1.36 R39.13 | length 121.2
  Top Layer w6: P1.36 492.2,780.78 513.86,759.13 R39.13
NetP1_37: P1.37 R39.14 | length 129.3
  Top Layer w6: P1.37 452.83,796.53 494.17,755.19 R39.14
NetP1_38: P1.38 R39.15 | length 137.5
  Top Layer w6: P1.38 413.46,812.28 474.49,751.25 R39.15
NetP1_39: P1.39 R39.16 | length 166.4
  Top Layer w6: P1.39 374.09,788.65 389.84,772.91 425.28,772.91 454.8,743.38 R39.16
NetP2_3: P2.3 U8.14 | length 326.3
  Top Layer w10: P2.3 988.27,1313.73 998.93,1303.07 U8.14
NetP2_4: P2.4 U8.13 | length 388.6
  Top Layer w10: P2.4 948.9,1369.9 966,1387 1129.73,1387 1188.07,1328.66 U8.13
NetP2_6: P2.6 U8.15 | length 454.6
  Top Layer w6: P2.6 870.16,1310.94 907.1,1274 U8.15@1276.63,1274
NetP2_7: P2.7 U8.16 | length 491.6
  Top Layer w6: P2.7 830.79,1329.08 904.86,1255 U8.16@1277,1255
NetP2_9: P2.9 R25.2 | length 413.2
  Top Layer w6: P2.9 752.05,1281.98 757,1277.03 839.69,1277.03 873.73,1243 951,1243 1017,1177 R25.2@1060,1177
NetR1_1: R1.1 U8.3 U8.8 | length 317.4
  Top Layer w10: U8.8 1460.02,1431.02 1443,1414 1443,1332 1471.93,1303.07 U8.3 1554.22,1303.07 1573.22,1284.07 R1.1
NetR2_1: R2.1 U8.1 U8.2 | length 214
  Top Layer w10: U8.1 R2.1@1574.19,1251.89 ; U8.2 1489.23,1277.48 1483.5,1283.21 ; R2.1@1578.86,1251.89 R2.1@1574.19,1251.89 ; R2.1 1577.44,1248.64 R2.1@1574.19,1251.89 ; 1483.5,1283.21 1482.71,1284 1482.71,1283.21 1483.5,1283.21 ; 1483.5,1283.21 1541.29,1283.21 1542.08,1284 R2.1@1574.19,1251.89
NetR5_2: R5.2 R6.1 U2.5 | length 77.8
  Top Layer w10: R5.2 R6.1 97.88,526.17 U2.5
NetR8_1: R8.1 U7.9 | length 457
  Top Layer w10: U7.9 1468.84,1531.16 1524,1476 1574,1476 1720,1330 R8.1
NetR8_2: R8.2 R9.2 | length 361.2
  Top Layer w10: R9.2 1720,918.14 R8.2
NetR9_1: R9.1 U6.2 | length 82.5
  Top Layer w6: U6.2 1556.5,876.9 1585.1,876.9 1586,876 1638.17,876 R9.1
NetR11_2: R11.2 R30.1 U6.31 U7.5 U9.3 | length 1995
  Top Layer w6: U9.3 886.73,744.73 893,751 v1(934,751) ; v1(1482,736) 1482,754.83 R30.1 ; R30.1@1507.28,782.32 U6.31 ; U7.5 1609.83,1590.21 v1(1614,1594.38) R11.2
  Signal Layer 1 w6: v1(934,751) 949,736 v1(1482,736)
  Bottom Layer w6: v1(1482,736) 1482,711 1500,693 1616.97,693 1730,806.03 1730,1478.38 v1(1614,1594.38)
NetR12_2: R12.2 R29.1 U6.32 U7.4 U9.2 | length 1883
  Top Layer w6: U9.2 v1@906.42,727.42 ; v1(1508.39,713.61) R29.1 1512,749.83 1527.39,749.83 1527.39,827.37 U6.32 ; U7.4 v1@1609,1570.53 ; v1(1613,1566.53) v1@1609,1570.53 ; R12.2@1620.78,1570.53 v1@1609,1570.53
  Signal Layer 1 w6: v1(911,732) 929.39,713.61 v1(1508.39,713.61)
  Bottom Layer w6: 1517,705 1612,705 1718,811 1718,1461.53 v1(1613,1566.53)
NetR13_1: R13.1 Y1.1 | length 50.2
  Top Layer w10: R13.1@1820.15,1645.84 Y1.1@1855.66,1610.33
NetR14_1: R14.1 U8.6 | length 63
  Top Layer w10: U8.6 1512.39,1381.65 1561.33,1381.65 R14.1
NetR14_2: R14.2 U7.10 | length 183
  Top Layer w10: U7.10 1458.53,1511.47 1510,1460 1550,1460 1570,1440
NetR16_1: R16.1 U6.29 | length 549.5
  Top Layer w10: R16.1 1167.35,462.47 1467.91,763.03 U6.29
NetR16_2: R16.2 U6.28 | length 519.9
  Top Layer w10: R16.2 1164.41,482.16 1448.23,765.97 U6.28
NetR16_3: R16.3 U6.27 | length 490.4
  Top Layer w10: R16.3 1161.47,501.84 1428.54,768.92 U6.27
NetR16_4: R16.4 U6.26 | length 460.8
  Top Layer w10: R16.4 1158.53,521.53 1408.86,771.86 U6.26
NetR16_5: R16.5 U9.41 | length 114.5
  Top Layer w10: U9.41 R16.5@1068.2,521.41
NetR16_6: R16.6 U9.40 | length 114.5
  Top Layer w10: U9.40 R16.6@1068.2,501.72
NetR16_7: R16.7 U9.39 | length 114.5
  Top Layer w10: U9.39 R16.7@1068.2,482.04
NetR17_1: R17.1 SW1.2 | length 307.3
  Top Layer w10: R17.1 1535.35,333.65 1557,312 1613.54,312 SW1.2
NetR19_1: R19.1
NetR19_2: R19.2
NetR19_3: R19.3
NetR19_4: R19.4
NetR21_1: R21.1 U10.14 | length 124.1
  Top Layer w8: R21.1 138.86,1326.17 138.86,1409.86 148.5,1419.5 U10.14
NetR22_1: R22.1 R24.2 U10.5 | length 101.9
  Top Layer w10: R22.1 U10.5@278.18,1397.57
NetR23_1: R23.1 U10.2 | length 163.6
  Top Layer w6: U10.2 211.52,1231.8 R23.1
NetR25_1: R25.1 U9.10 | length 807.4
  Top Layer w6: U9.10 748.94,773.65 773.65,798.35 1052.03,798.35 1085.57,831.89 1085.57,1141.57 R25.1@1121,1177
NetR37_11: R37.11
NetR37_12: R37.12
NetR37_13: R37.13 U9.20 | length 1079.5
  Top Layer w6: v1(610.32,517) 614.72,521.41 U9.20 ; v1(708.74,1268.97) 704.8,1265.03 834.72,1265.03 860.32,1239.44 R37.13
  Bottom Layer w6: v1(610.32,517) 640.9,517 657.56,533.66 657.56,1166.61 708.74,1217.79 v1(708.74,1268.97)
NetR37_14: R37.14 R38.10 R38.16 R39.6 U9.17 | length 1394.8
  Top Layer w6: R38.16 435.12,1274.87 464.65,1304.4 531.57,1304.4 553.23,1282.75 ; R39.6 553.23,605.58 578.35,580.46 U9.17 ; R38.10 v1(553.23,1253.22) 553.23,1282.75 ; R37.14 840.63,1227.63 821.4,1246.86 699.35,1246.86 663.46,1282.75 553.23,1282.75
  Bottom Layer w6: v1(553.23,644.95) 554.35,646.08 554.35,1252.09 v1(553.23,1253.22)
NetR37_15: R37.15 R38.12 R39.5 U9.16 | length 1216.8
  Top Layer w6: R38.12 v1(513.86,1255.19) ; v1(533.54,621.33) R39.5 ; v1@586.22,600.15 U9.16 ; v1(649.68,1257.16) 671.98,1234.86 813.72,1234.86 820.94,1227.63 R37.15
  Bottom Layer w6: v1(513.86,1255.19) 512.73,1254.06 512.73,677.57 531.57,658.73 v1@531.57,623.3 ; v1@518.92,1260.25 531.39,1272.72 634.13,1272.72 v1(649.68,1257.16) ; v1(533.54,621.33) 551.26,603.61 v1(582.76,603.61)
NetR37_16: R37.16 R38.11 R38.15 R39.7 U9.15 | length 1353.7
  Top Layer w6: R38.15 454.8,1274.68 472.52,1292.4 512.08,1292.4 533.54,1270.94 R38.11 ; R39.7 572.91,648.89 v1(584.72,637.08) 602.44,619.36 U9.15@681.54,619.36 ; v1(675.28,1215.82) R37.16
  Bottom Layer w6: v1(504.02,1284.72) 665.43,1284.72 675.28,1274.87 v1(675.28,1215.82) v1@674.15,1216.94 ; v1(584.72,637.08) 593.72,646.08 593.72,1184.54 626.13,1216.94 v1@674.15,1216.94 ; v1@673.31,1217.79 v1@674.15,1216.94
NetR38_9: R38.9 U9.19 | length 803.9
  Top Layer w6: R38.9 572.91,1231.57 578.82,1237.47 598.5,1237.47 633.94,1202.04 v1(633.94,1198.1) v1@630,1198.1 ; v1(637.87,540.62) U9.19@681.54,540.62
  Bottom Layer w6: v1(633.94,1198.1) 641.84,1190.2 641.84,544.59 v1(637.87,540.62)
NetR38_13: R38.13
NetR38_14: R38.14 U9.18 | length 947.4
  Top Layer w6: R38.14 v1(474.49,1259.13) ; v1@476.93,560.78 U9.18
  Bottom Layer w6: v1(474.49,558.34) 473.36,559.46 473.36,628.71 474.84,630.2 474.84,645.8 473.36,647.29 473.36,1258 v1(474.49,1259.13)
NetR39_1: R39.1 U9.13 | length 355.1
  Top Layer w6: v1(426.51,672.51) R39.1 ; v1(623,701) 664.8,659.2 U9.13
  Signal Layer 1 w6: v1(426.51,672.51) 426.51,706.3 448.21,728 596,728 v1(623,701)
NetR39_2: R39.2 U9.12 | length 315.2
  Top Layer w6: v1(456,638) 474.49,656.49 R39.2 ; v1@683.24,686.76 U9.12
  Signal Layer 1 w6: v1(456,638) 494,676 670,676 v1(682,688)
NetR39_3: R39.3 U9.14 | length 233.4
  Top Layer w6: v1(494.17,644.83) R39.3 ; v1(615,648) 623.48,639.52 U9.14
  Signal Layer 1 w6: v1(494.17,644.83) 513.14,663.8 599.2,663.8 v1(615,648)
NetR39_4: R39.4 U9.43 | length 635
  Top Layer w6: R39.4 513.86,610.14 v1(542,582) ; U9.43 v1@1009.78,560.78
  Signal Layer 1 w6: v1(542,582) 553,571 1000,571 v1(1010,561)
NetR39_8: R39.8
NetU8_9: U8.9
NetU8_10: U8.10
NetU8_11: U8.11
NetU8_12: U8.12
NetU9_11: U9.11
NetU9_26: U9.26
NetU9_29: U9.29
NetU9_30: U9.30
NetU9_31: U9.31
PA11: U9.32 USB1.2 | length 565.2
  Top Layer w10: USB1.2@458.74,223.65 458.74,365.43 480.39,387.08 702.29,387.08 702.97,386.39 841.91,386.39 847.36,391.84 U9.32
PA12: U9.33 USB1.3 | length 562.7
  Top Layer w10: USB1.3@484.33,223.65 484.33,363.46 491.95,371.08 695.66,371.08 696.34,370.39 853.47,370.39 867.05,383.97 U9.33
PA13: P3.3 U9.34 | length 468.8
  Top Layer w10: U9.34 886.73,292.27 1019,160 1108,160 1124,176 P3.3
PA14: P3.2 U9.37 | length 315.6
  Top Layer w10: U9.37 1015.7,442.67 1098.5,359.87 P3.2@1098.5,223.41
PA15: R16.8 U9.38 | length 114.5
  Top Layer w10: U9.38 R16.8@1068.2,462.35
REF1_N: C28.2 P2.16 | length 1092.5
  Top Layer w6: P2.16 850.47,1573.15 844,1579.62 844,1614 870,1640 1190.66,1640 1399.75,1430.91 1399.75,1249.32 1505.07,1144 1505.07,1128.21 C28.2
REF1_P: C27.2 P2.15 | length 1144
  Top Layer w6: P2.15 811.1,1573.15 828,1590.05 828,1620.63 860.37,1653 1194.63,1653 1415,1432.63 1415,1256.7 1521.07,1150.63 1521.07,1128.21 C27.2
REFLECT1_N: C31.1 P2.19 | length 849.6
  Top Layer w6: P2.19 968.58,1573.15 963.06,1578.67 963.06,1582.94 978.13,1598 1181.98,1598 1352.03,1427.95 1352.03,1200.59 1352.05,1194.92 1418.07,1128.9 C31.1
REFLECT1_P: C30.1 P2.18 | length 912.4
  Top Layer w6: P2.18 932.21,1543.62 932.21,1574.84 971.37,1614 1182.95,1614 1364.03,1432.92 1364.03,1205.56 1434.07,1135.52 1434.07,1134.9 C30.1
SW1: L3.1 U10.11 | length 79.4
  Top Layer w10: L3.1@162.87,1528.13 201.68,1489.32 U10.11
SW2: L3.2 U10.9 | length 81.7
  Top Layer w10: U10.9 241.05,1490.05 L3.2@280.98,1529.98
VSYS: C8.1 C9.1 C42.2 C43.2 C44.2 D1.2 D2.2 R21.2 T11.1 U2.10 U2.11 U2.12 U2.13 U10.12 U10.13 | length 2320.9
  Top Layer w8: v1(40,1317) R21.2
  Top Layer w10: 248.09,422.91 U2.13
  Top Layer w20: C8.1 D2.2@433.15,469.88 ; v1(744.17,205.98) D1.2
  Top Layer w30: C43.2@62.87,1455.71 152.29,1455.71 159,1449 ; T11.1@135,307 239,307 307.91,375.91 C9.1
  Bottom Layer w30: v1(80,1480) v1(50,1480) 30,1460 30,407 T11.1 ; v1(358.35,398.89) 614.25,398.89 740.24,272.91 740.24,209.91 v1(744.17,205.98)
  other v2: 763.86,194.17 385.91,398.89
pads on no net: P1.24 P1.25 P1.26 P1.27 P1.28 P1.29 P3.4 R19.5 R19.6 R19.7 R19.8 R37.7 R37.8 R37.9 R37.10 SW1.3 SW1.4 U2.4 U3.4 U4.4 U5.4 U6.4 U6.6 U6.14 U6.15 U6.16 U6.17 U6.18 U6.19 U6.20 U6.21 U7.3 U8.7 U9.4 U9.6 U9.7 U9.21 U9.25 U9.27 U9.28 U9.42 U10.6 U10.15 USB1.4

## Polygon pours and split planes (outlines as drawn)
GND on Bottom Layer "GND_L04_P002" (solid, remove dead copper, pour order 2): -145.59,0 1960,0 1960,1680.39 -145.59,1680.39
GND on Top Layer "GND_L01_P000" (solid, remove dead copper, pour order 0): 0,1680.39 1960,1680.39 1960,0 0,0
GND on Internal Plane 1 (split plane): 1939.9,20.1 20.1,20.1 20.1,1660.29 1939.9,1660.29

## Keep-outs
Keep-Out Layer:
  the board outline again, w13

## Other copper
Top Layer:
  rectangle net 3.6V: 259.84,709.91 326.85,1040.62
  rectangle net NetL2_1: 177.24,555.7 220.55,599.68
  rectangle net VSYS: 173.31,387.08 366.22,430.39
  rectangle net GND: 93,434 122,492

## Text inside footprints (layer, text, board x,y; h text height)
R16: Mechanical 1 "R1" at 1080.91,499.84 h11.81 r270
R19: Mechanical 1 "R1" at 1759.89,823.3 h11.81 r180
U6: Top Overlay "*" at 1576.18,837.63 h39.37 r180